# Altium PCB Chrono.PcbDoc
Units mm, origin at the board's own origin, x right, y up, seen from the top; angles counter-clockwise.
Board outline 55.07 x 60.6 mm, 2 copper layers (Top Layer, Bottom Layer); 11 components, 11 nets, 91 pads, 0 vias.
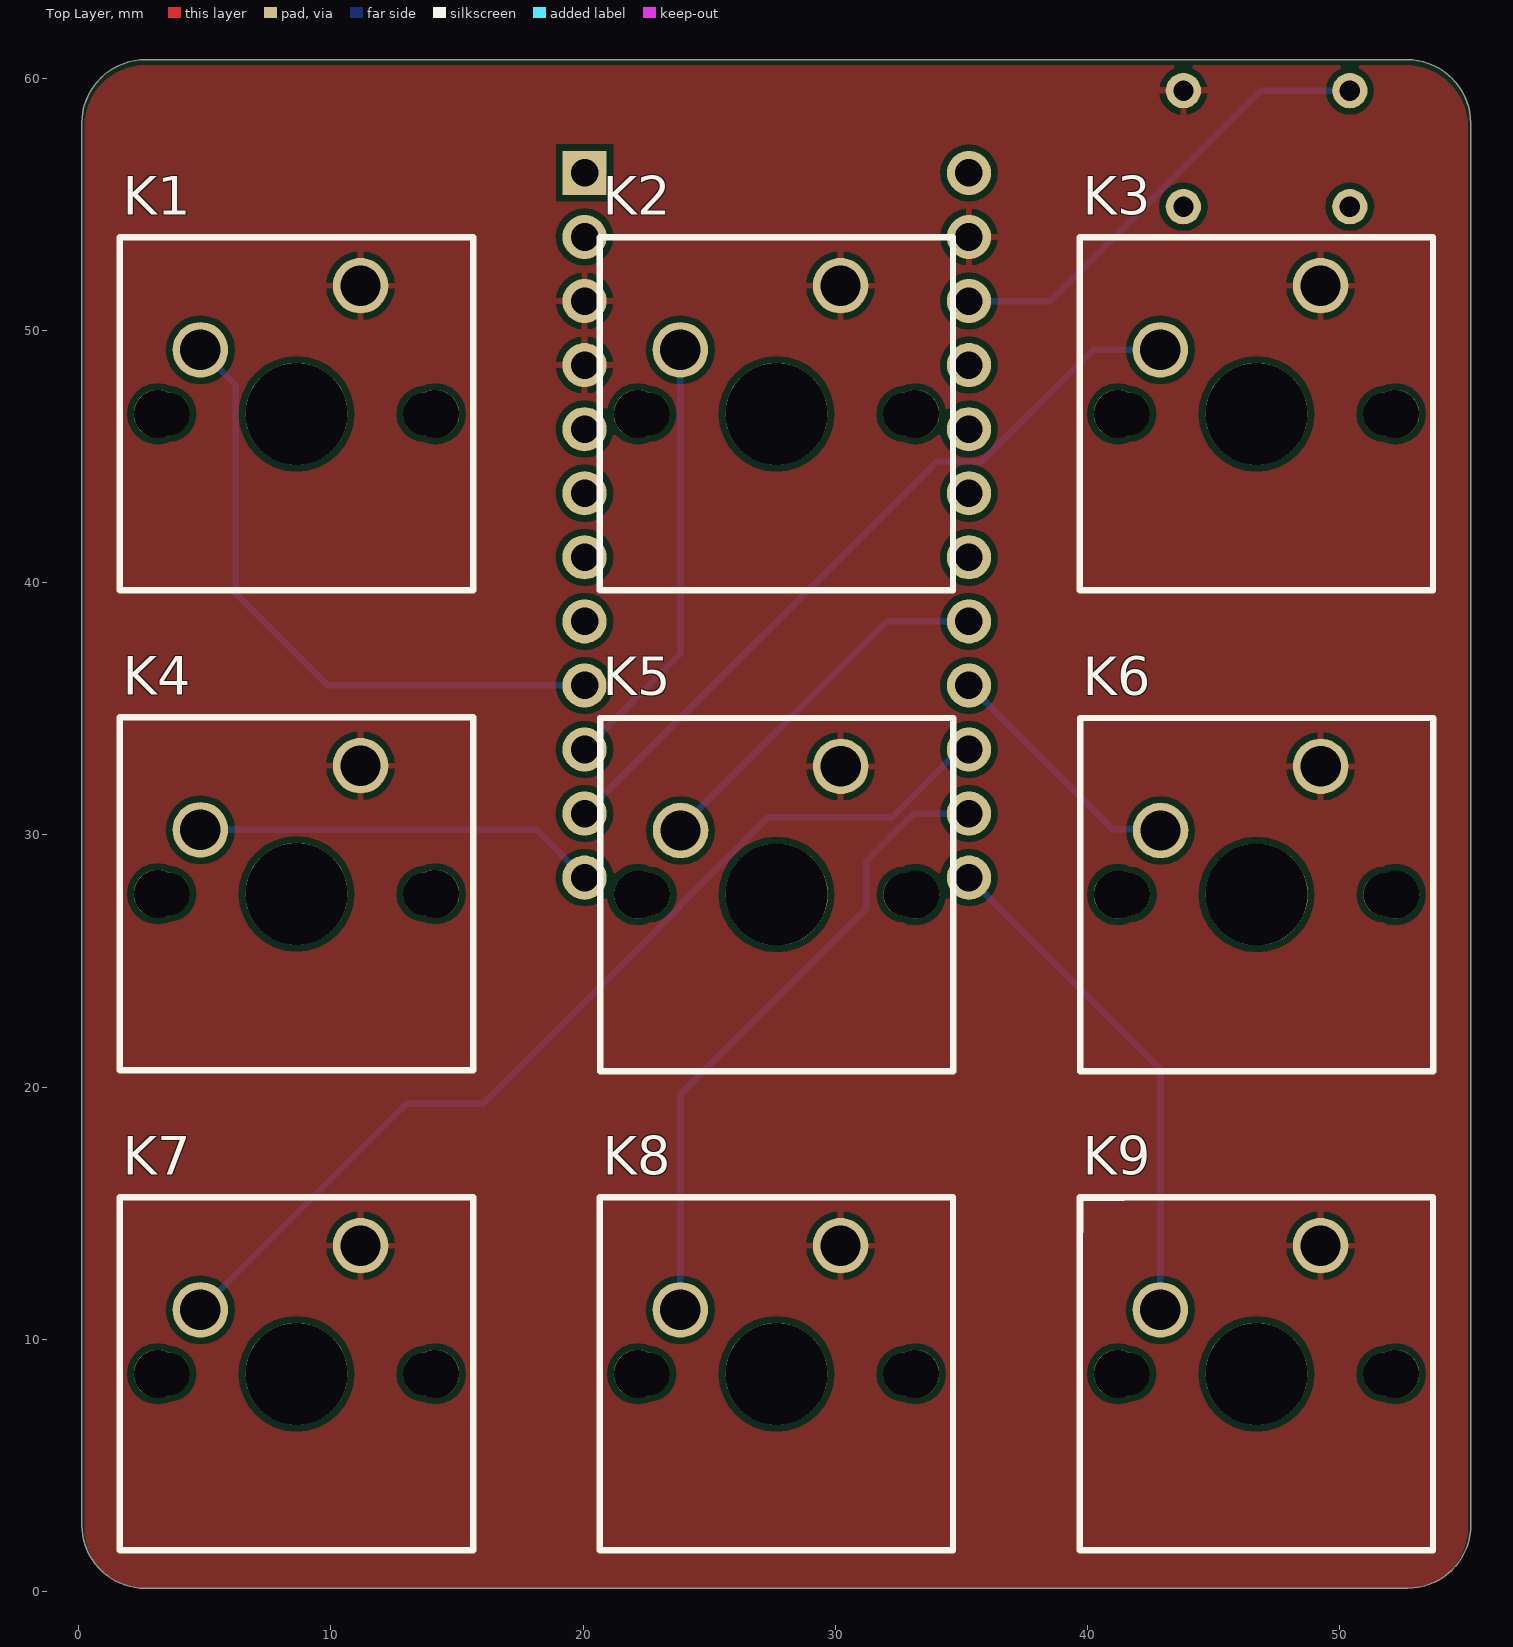
[diagram p0: Top Layer view]
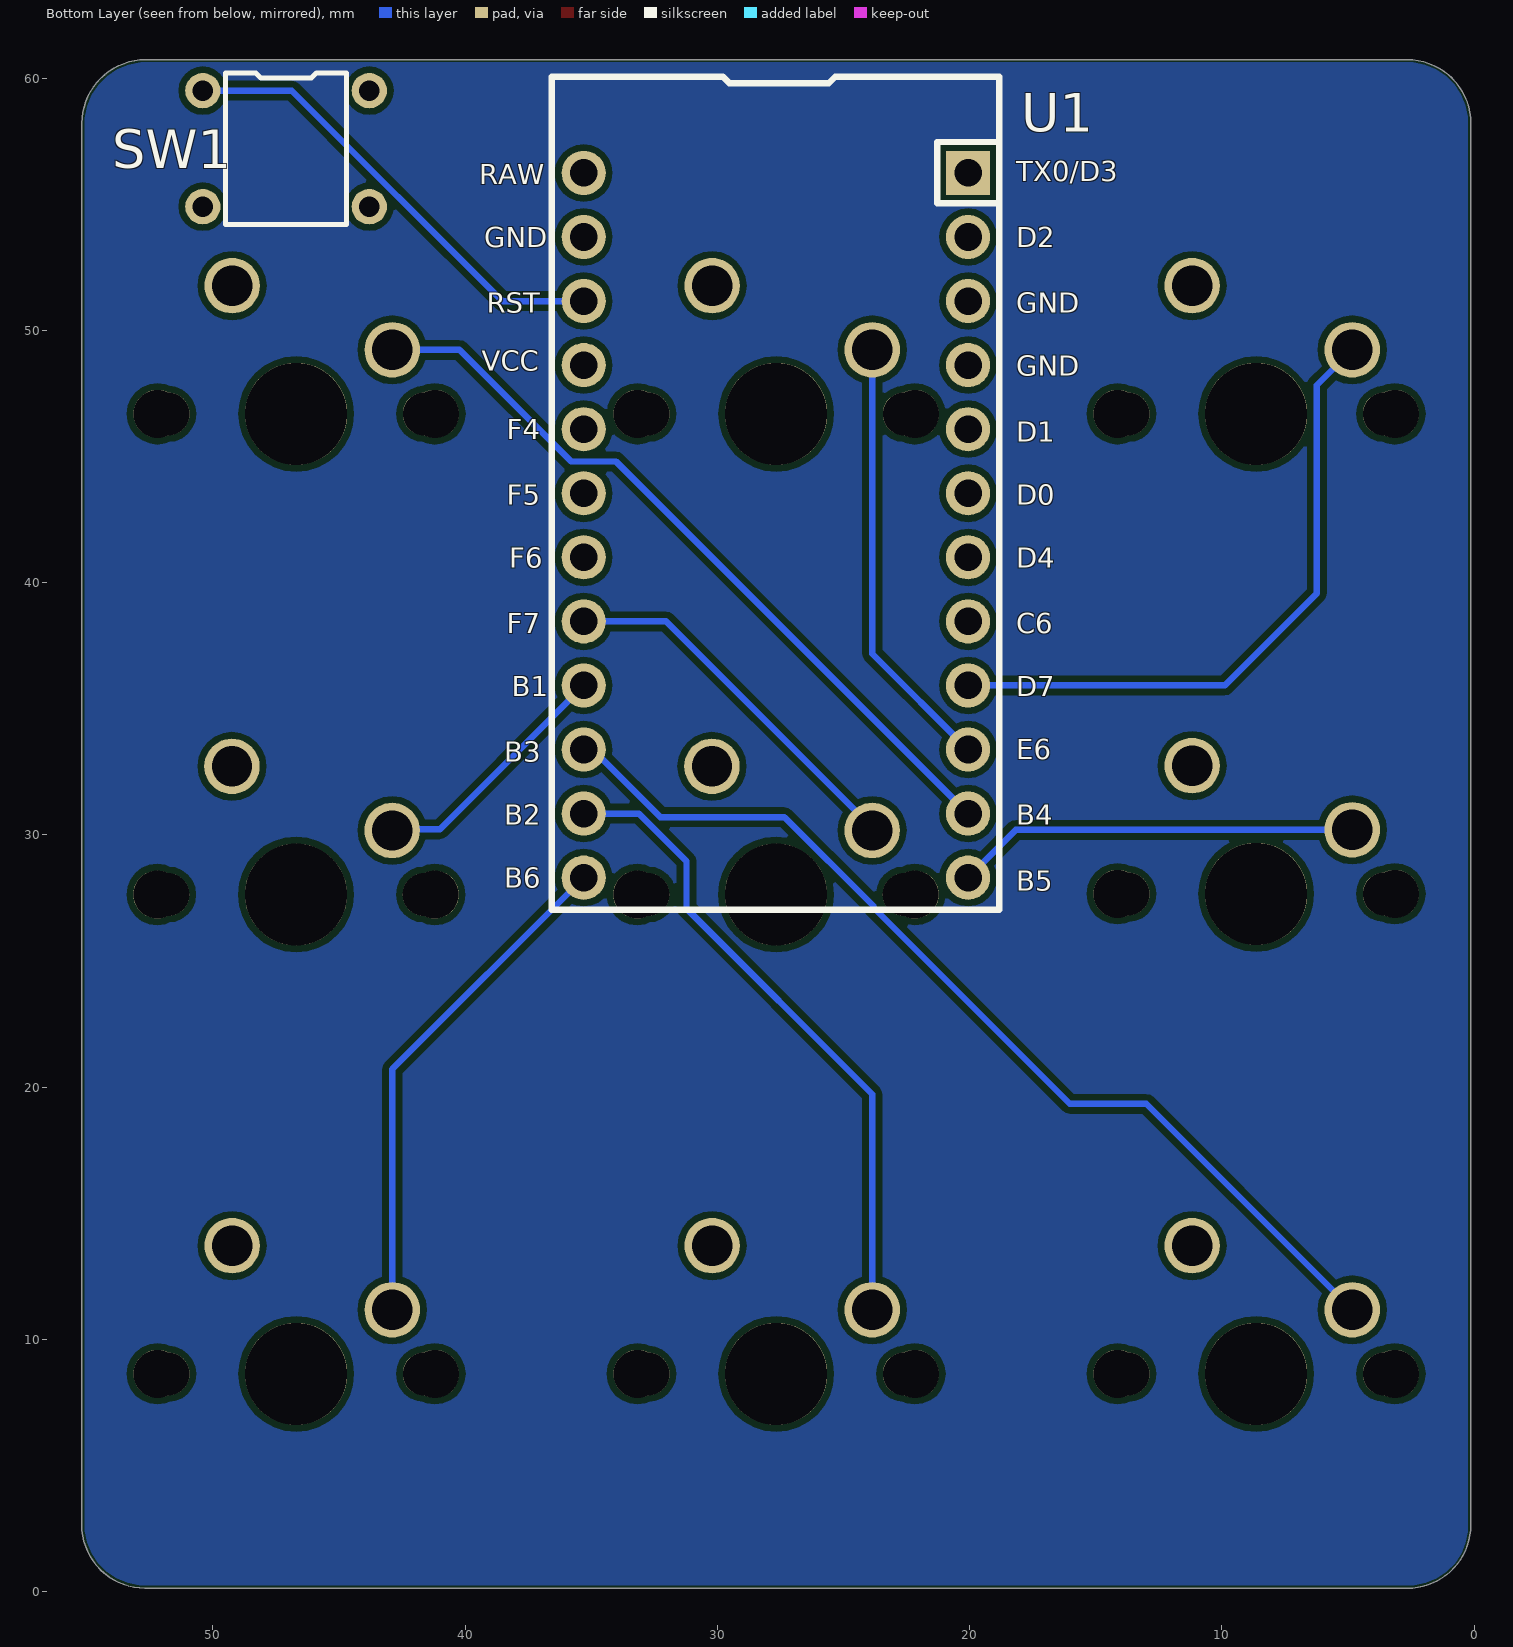
[diagram p1: Bottom Layer view, seen from below]

## Layer stack, top to bottom
Top Solder: solder mask 0.0102, Solder Resist, Dk 3.5
Top Layer: signal copper 0.0356
Dielectric 1: dielectric 0.32, FR-4, Dk 4.8
Bottom Layer: signal copper 0.0356
Bottom Solder: solder mask 0.0102, Solder Resist, Dk 3.5

## Board outline
2.638,0.127 cw(c2.638,2.638) 0.127,2.638 0.125,58.2 0.127,58.209 cw(c2.645,58.209) 2.645,60.727 52.677,60.727 52.668,60.727 cw(c52.668,58.202) 55.193,58.202 55.2,58.275 55.2,2.639 cw(c52.692,2.639) 52.692,0.131 52.692,0.127

## Design rules (kind name [scope] priority, off if disabled: settings)
Clearance [All] p1: gap=0.254 ignorepadtopadclearanceinfootprint=FALSE except(0: Arc-Hole Track-Hole SMDPad-Hole THPad-Hole Via-Hole Fill-Hole Poly-Hole Region-Hole Text-Hole)
PolygonConnect [All] p1: connectstyle=Relief reliefconductorwidth=0.254 reliefentries=4 polygonreliefangle="90 Angle" airgapwidth=0.254
RoutingVias [All] p1: holewidth=0.711 width=1.27 viastyle="Through Hole" minholewidth=0.711 minwidth=1.27 maxholewidth=0.711 maxwidth=1.27
SolderMaskExpansion [All] p1: expansion=0.102 istentingtop=FALSE
Width [All] p1: maxlimit=0.254 minlimit=0.254 preferedwidth=0.254
30 further rules are at their usual default settings.

## Components (designator, comment, footprint, x,y, rotation, side; value= is the part's Value field where it differs from the comment)
K1 "KEYSW-canadian_parts" SOCKET 1.589,39.687 r0 top
K2 "KEYSW-canadian_parts" SOCKET 20.619,39.687 r0 top
K3 "KEYSW-canadian_parts" SOCKET 39.649,39.687 r0 top
K4 "KEYSW-canadian_parts" SOCKET 1.589,20.657 r0 top
K5 "KEYSW-canadian_parts" SOCKET 20.625,20.631 r0 top
K6 "KEYSW-canadian_parts" SOCKET 39.655,20.631 r0 top
K7 "KEYSW-canadian_parts" SOCKET 1.589,1.627 r0 top
K8 "KEYSW-canadian_parts" SOCKET 20.619,1.627 r0 top
K9 "KEYSW-canadian_parts" SOCKET 39.649,1.627 r0 top
SW1 "SW_Push" RESET 48.9,53.8 r90 bottom
U1 "ProMicro-keebio" PRO-MICRO 35.3,56.24 r180 bottom

## Footprints (in the part's own frame and the unit in brackets; to place one, negate y for a bottom-side part, rotate by r counter-clockwise, add the part's x,y. Pads: shape width x height; smd on the part's side, far side on the other; paste and mask are expansions set on the pad)
PRO-MICRO [mm]
  rect 1.753x1.753 hole 1.092: 1(15.24,0)
  round 1.753 hole 1.092: 2(15.24,-2.54) 3(15.24,-5.08) 4(15.24,-7.62) 5(15.24,-10.16) 6(15.24,-12.7) 7(15.24,-15.24) 8(15.24,-17.78) 9(15.24,-20.32) 10(15.24,-22.86) 11(15.24,-25.4) 12(15.24,-27.94) 13(0,-27.94) 14(0,-25.4) 15(0,-22.86) 16(0,-20.32) 17(0,-17.78) 18(0,-15.24) 19(0,-12.7) 20(0,-10.16) 21(0,-7.62) 22(0,-5.08) 23(0,-2.54) 24(0,0)
  silkscreen extent -1.27,-29.21 16.48,3.81
RESET [mm]
  round 1.4 hole 0.8: 1(5.7,1.5) 2(5.7,-5.1) 3(1.1,1.5) 4(1.1,-5.1)
  silkscreen extent 0.4,-4.2 6.4,0.6
SOCKET [mm]
  round 2.2 hole 1.6: 1(3.24,9.54) 2(9.59,12.08)
  round 1.9 hole 1.9: 3(1.55,7) 3(12.55,7)
  round 1.7 hole 1.7: 3(1.97,7) 3(12.13,7)
  round 4.05 hole 4.05: 3(7.05,7)
  silkscreen extent 0.05,0 14.05,14

## Nets (pads, with @x,y where several pads share a name; then routed paths per layer and width w, separated by ;. In a path a pad name is that pad's centre, name@x,y a point inside that pad or via, vN(x,y) a via of type N, cw(c..) or ccw(c..) an arc to the next point about the centre after c; other vN are vias at no path point)
GND: K1.2 K2.2 K3.2 K4.2 K5.2 K6.2 K7.2 K8.2 K9.2 SW1.2 U1.3 U1.4 U1.23
NetK1_1: K1.1 U1.9 | length 25.6
  Bottom Layer w0.254: K1.1 6.233,47.823 6.233,39.567 9.88,35.92 U1.9
NetK2_1: K2.1 U1.10 | length 17.4
  Bottom Layer w0.254: U1.10 23.859,37.179 K2.1
NetK3_1: K3.1 U1.11 | length 30.4
  Bottom Layer w0.254: U1.11 34.018,44.797 35.796,44.797 40.225,49.227 K3.1
NetK4_1: K4.1 U1.12 | length 16
  Bottom Layer w0.254: K4.1 18.163,30.197 U1.12 U1.12@20.053,28.293
NetK5_1: K5.1 U1.17 | length 14.9
  Bottom Layer w0.254: K5.1 23.865,30.29 32.035,38.46 U1.17
NetK6_1: K6.1 U1.16 | length 10
  Bottom Layer w0.254: U1.16@35.3,35.853 U1.16 41.008,30.212 42.854,30.212 K6.1
NetK7_1: K7.1 U1.15 | length 39.7
  Bottom Layer w0.254: K7.1 12.992,19.33 16.035,19.33 23.826,27.121 23.826,27.185 27.341,30.7 32.257,30.7 34.937,33.38 U1.15
NetK8_1: K8.1 U1.14 | length 25.7
  Bottom Layer w0.254: K8.1 23.859,19.709 31.225,27.075 31.225,28.95 33.115,30.84 U1.14
NetK9_1: K9.1 U1.13 | length 20.3
  Bottom Layer w0.254: U1.13 42.889,20.711 K9.1
NetSW1_1: SW1.1 U1.22 | length 18.6
  Bottom Layer w0.254: U1.22 38.531,51.16 46.871,59.5 SW1.1
pads on no net: K1.3 K2.3 K3.3 K4.3 K5.3 K6.3 K7.3 K8.3 K9.3 SW1.3 SW1.4 U1.1 U1.2 U1.5 U1.6 U1.7 U1.8 U1.18 U1.19 U1.20 U1.21 U1.24

## Polygon pours and split planes (outlines as drawn)
GND on Top Layer "GND_L01_P022" (solid, pour order 22): 0.245,58.11 cw(c2.645,58.11) 2.645,60.51 52.62,60.51 cw(c52.62,58.06) 55.07,58.06 55.07,2.535 cw(c52.67,2.535) 52.67,0.135 2.595,0.135 cw(c2.595,2.485) 0.245,2.485
GND on Top Layer "GND_L01_P014" (solid, pour order 14): 19.525,0
no net on Bottom Layer "NONET_L02_P019" (solid, pour order 19): 0.25,58.225 cw(c2.65,58.225) 2.65,60.625 52.625,60.625 cw(c52.625,58.175) 55.075,58.175 55.075,2.65 cw(c52.675,2.65) 52.675,0.25 2.6,0.25 cw(c2.6,2.6) 0.25,2.6

## Other copper
Top Layer:
  region: 146.878,207.896

## Silkscreen, mask and mechanical layers (free items; w line width, h text height)
Top Overlay:
  lines w0.254: 39.705,14.252 39.705,15.601 41.422,15.601
Mechanical 1:
  lines w0.254: 0.125,58.2 0.127,2.638 ccw(c2.638,2.638) 2.638,0.127 52.692,0.127 ; 0.127,58.209 cw(c2.645,58.209) 2.645,60.727 52.677,60.727 ; 52.668,60.727 cw(c52.668,58.202) 55.193,58.202 ; 52.692,0.131 ccw(c52.692,2.639) 55.2,2.639 55.2,58.275

## Text inside footprints (layer, text, board x,y; h text height)
U1: Bottom Overlay "F6" at 38.25,40.59 h0.8; Bottom Overlay "GND" at 18.15,50.69 h0.8; Bottom Overlay "RAW" at 39.45,55.79 h0.8; Bottom Overlay "GND" at 39.25,53.29 h0.8; Bottom Overlay "RST" at 39.15,50.69 h0.8; Bottom Overlay "VCC" at 39.35,48.39 h0.8; Bottom Overlay "F4" at 38.35,45.69 h0.8; Bottom Overlay "F5" at 38.35,43.09 h0.8; Bottom Overlay "F7" at 38.35,37.99 h0.8; Bottom Overlay "B1" at 38.15,35.49 h0.8; Bottom Overlay "B3" at 38.45,32.89 h0.8; Bottom Overlay "B2" at 38.45,30.39 h0.8; Bottom Overlay "B6" at 38.45,27.89 h0.8; Bottom Overlay "D2" at 18.15,53.29 h0.8; Bottom Overlay "GND" at 18.15,48.19 h0.8; Bottom Overlay "D1" at 18.15,45.59 h0.8; Bottom Overlay "D0" at 18.15,43.09 h0.8; Bottom Overlay "D4" at 18.15,40.59 h0.8; Bottom Overlay "C6" at 18.15,37.99 h0.8; Bottom Overlay "D7" at 18.15,35.49 h0.8; Bottom Overlay "TX0/D3" at 18.15,55.904 h0.8; Bottom Overlay "E6" at 18.15,32.99 h0.8; Bottom Overlay "B4" at 18.15,30.39 h0.8; Bottom Overlay "B5" at 18.15,27.79 h0.8